# Altium PCB 400432.PcbDoc (part 2 of 7)
Units mm, origin at the board's own origin, x right, y up, seen from the top; angles counter-clockwise.
Board outline 136.53 x 63.5 mm, 4 copper layers (Top Layer, Mid-Layer 1, Mid-Layer 2, Bottom Layer), stack 1.505 mm thick; 354 components, 245 nets, 1470 pads, 1957 vias.
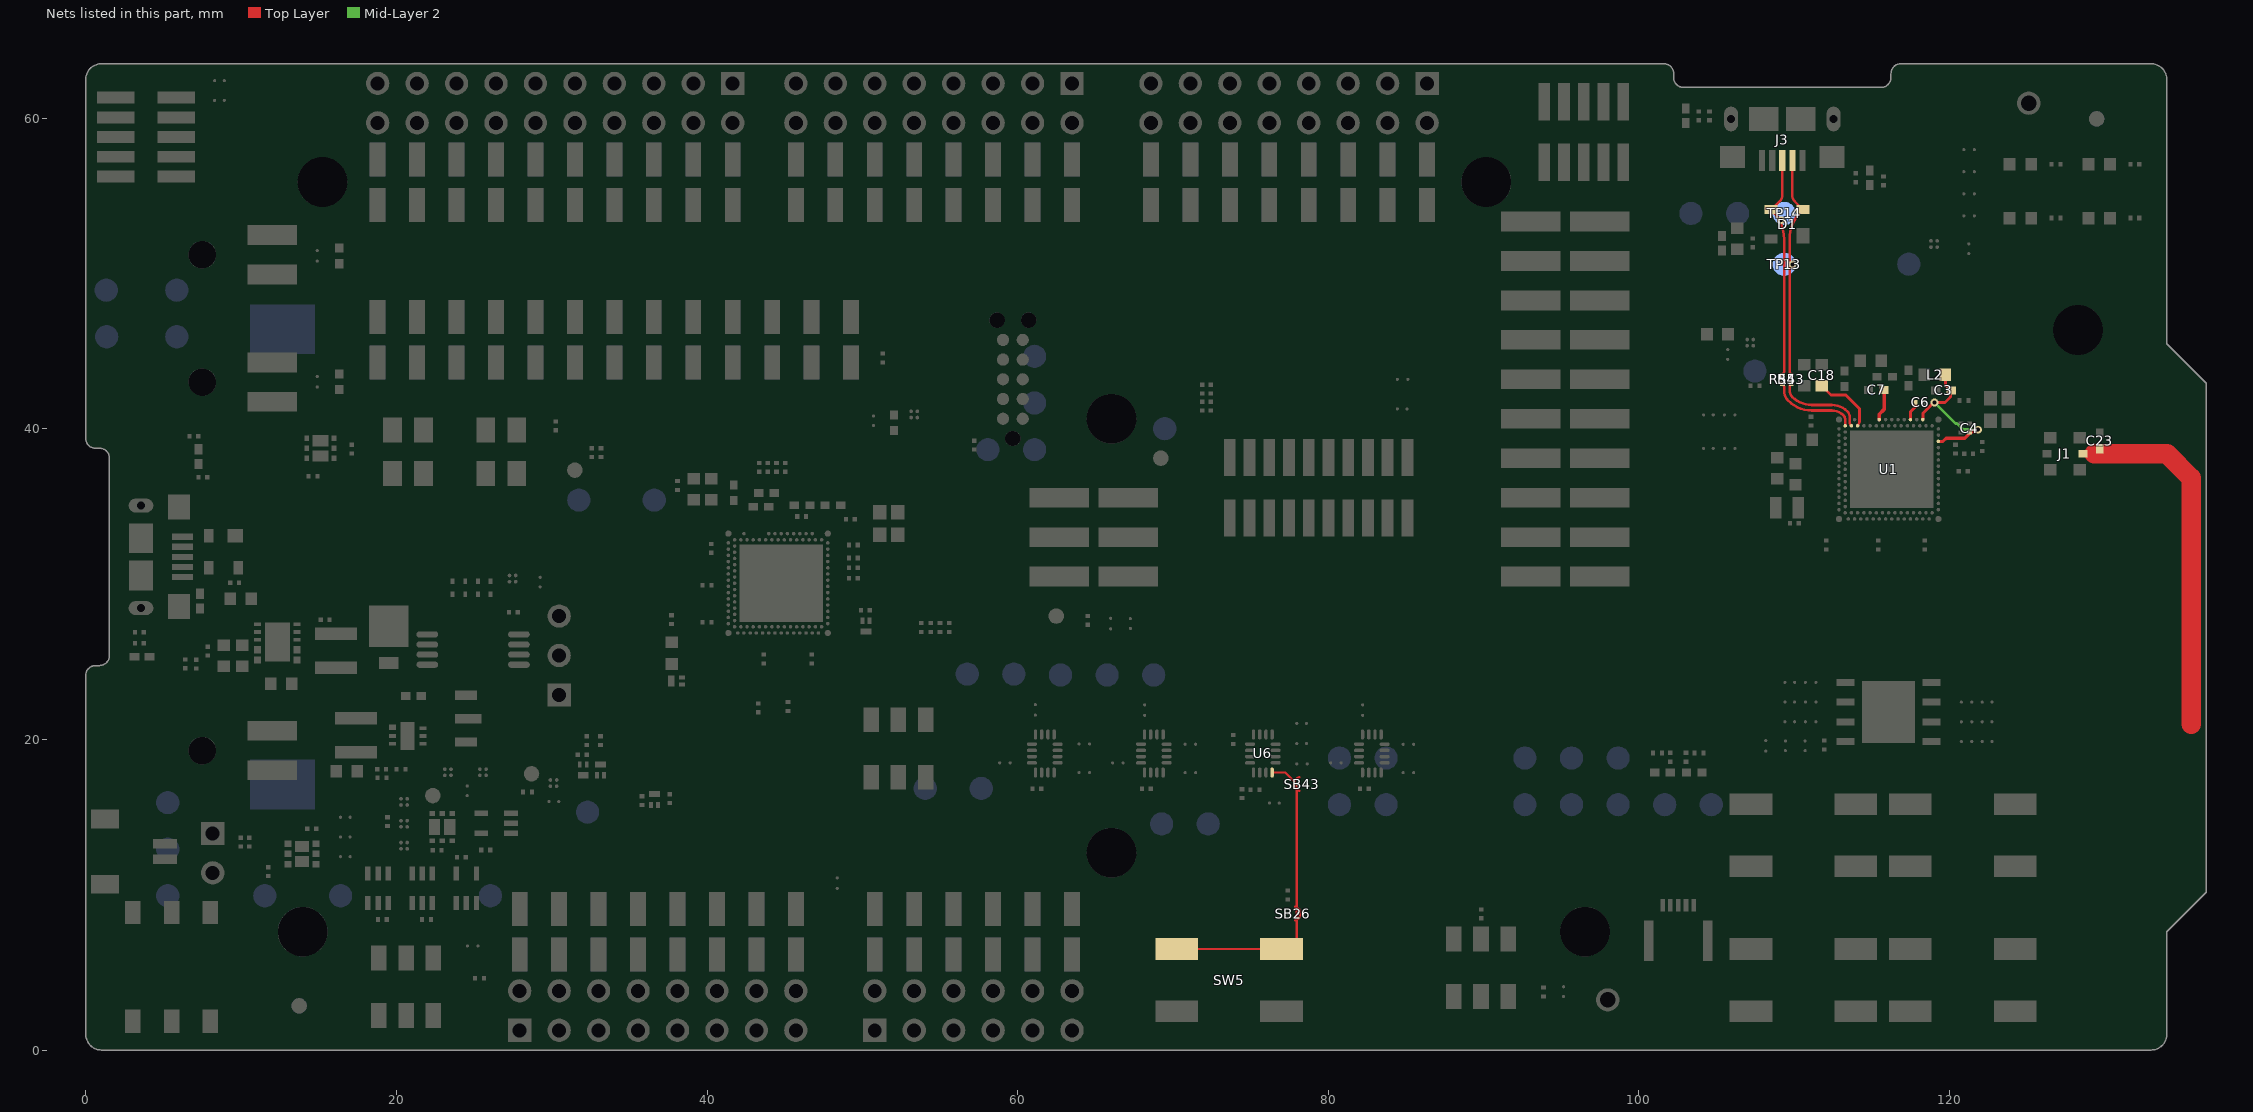
[diagram p4: the nets of this part, all layers, seen from the top]

## Footprints (in the part's own frame and the unit in brackets; to place one, negate y for a bottom-side part, rotate by r counter-clockwise, add the part's x,y. Pads: shape width x height; smd on the part's side, far side on the other; paste and mask are expansions set on the pad) (continued)
Solderbridge#4 [mm]
  round 0.2 smd paste-10: 1(-0.312,0) 2(0.312,0)
  Top Layer region: 0.077,0.432 0.152,0.505 0.271,0.467 0.335,0.424 0.409,0.351 0.462,0.292 0.521,0.193 0.549,0.099 0.544,-0.122 0.518,-0.193 0.434,-0.33 0.351,-0.411 0.259,-0.469 0.157,-0.5 0.107,-0.483 0.077,-0.43
  Top Layer region: -0.077,-0.432 -0.152,-0.505 -0.271,-0.467 -0.335,-0.424 -0.409,-0.351 -0.462,-0.292 -0.521,-0.193 -0.549,-0.099 -0.544,0.122 -0.518,0.193 -0.434,0.33 -0.351,0.411 -0.259,0.469 -0.157,0.5 -0.107,0.483 -0.077,0.43
  Top Layer lines w0.152: 0.153,0.431 cw(c0.042,0) 0.487,0 cw(c0.042,0) 0.153,-0.431 ; -0.153,0.431 ccw(c-0.042,0) -0.487,0 ccw(c-0.042,0) -0.153,-0.431
Solderbridge#5 [mm]
  round 0.2 smd paste-10: 1(-0.312,0) 2(0.312,0)
  Top Layer region: 0.077,0.432 0.152,0.505 0.271,0.467 0.335,0.424 0.409,0.351 0.462,0.292 0.521,0.193 0.549,0.099 0.544,-0.122 0.518,-0.193 0.434,-0.33 0.351,-0.411 0.259,-0.469 0.157,-0.5 0.107,-0.483 0.077,-0.43
  Top Layer region: -0.077,-0.432 -0.152,-0.505 -0.271,-0.467 -0.335,-0.424 -0.409,-0.351 -0.462,-0.292 -0.521,-0.193 -0.549,-0.099 -0.544,0.122 -0.518,0.193 -0.434,0.33 -0.351,0.411 -0.259,0.469 -0.157,0.5 -0.107,0.483 -0.077,0.43
  Top Layer lines w0.152: 0.153,-0.431 ccw(c0.042,0) 0.153,0.431 ; -0.153,-0.431 cw(c-0.042,0) -0.429,-0.22 cw(c-0.042,0) -0.479,-0.081 cw(c-0.042,0) -0.479,0.081 cw(c-0.042,0) -0.461,0.149 cw(c-0.042,0) -0.312,0.353 cw(c-0.042,0) -0.153,0.431
Solderbridge#6 [mm]
  round 0.2 smd paste-10: 1(-0.312,0) 2(0.312,0)
  Top Layer region: 0.077,0.432 0.152,0.505 0.271,0.467 0.335,0.424 0.409,0.351 0.462,0.292 0.521,0.193 0.549,0.099 0.544,-0.122 0.518,-0.193 0.434,-0.33 0.351,-0.411 0.259,-0.469 0.157,-0.5 0.107,-0.483 0.077,-0.43
  Top Layer region: -0.077,-0.432 -0.152,-0.505 -0.271,-0.467 -0.335,-0.424 -0.409,-0.351 -0.462,-0.292 -0.521,-0.193 -0.549,-0.099 -0.544,0.122 -0.518,0.193 -0.434,0.33 -0.351,0.411 -0.259,0.469 -0.157,0.5 -0.107,0.483 -0.077,0.43
  Top Layer lines w0.152: -0.153,0.431 ccw(c-0.042,0) -0.487,0 ccw(c-0.042,0) -0.312,-0.353 ccw(c-0.042,0) -0.153,-0.431 ; 0.153,0.431 cw(c0.042,0) 0.457,0.16 cw(c0.042,0) 0.487,-0.015 cw(c0.042,0) 0.486,-0.025 cw(c0.042,0) 0.457,-0.16 cw(c0.042,0) 0.407,-0.254 cw(c0.042,0) 0.33,-0.339 cw(c0.042,0) 0.153,-0.431
Solderbridge_Shorted#1 [mm]
  round 0.2 smd paste-10: 1(-0.338,0) 2(0.338,0)
  Top Layer region: -0.102,-0.432 -0.178,-0.505 -0.296,-0.467 -0.361,-0.424 -0.434,-0.351 -0.488,-0.292 -0.546,-0.193 -0.574,-0.099 -0.569,0.122 -0.544,0.193 -0.46,0.33 -0.376,0.411 -0.284,0.469 -0.183,0.5 -0.132,0.483 -0.102,0.43
  Top Layer region: 0.102,0.432 0.178,0.505 0.296,0.467 0.361,0.424 0.434,0.351 0.488,0.292 0.546,0.193 0.574,0.099 0.569,-0.122 0.544,-0.193 0.46,-0.33 0.376,-0.411 0.284,-0.469 0.183,-0.5 0.132,-0.483 0.102,-0.43
  Top Layer lines w0.152: 0.178,0.431 cw(c0.068,0) 0.178,-0.431 ; -0.178,0.431 ccw(c-0.068,0) -0.178,-0.431
  Top Layer lines w0.203: 0.338,0 -0.338,0
Solderbridge_Shorted#2 [mm]
  round 0.2 smd paste-10: 1(-0.338,0) 2(0.338,0)
  Top Layer region: 0.102,0.432 0.178,0.505 0.296,0.467 0.361,0.424 0.434,0.351 0.488,0.292 0.546,0.193 0.574,0.099 0.569,-0.122 0.544,-0.193 0.46,-0.33 0.376,-0.411 0.284,-0.469 0.183,-0.5 0.132,-0.483 0.102,-0.43
  Top Layer region: -0.102,-0.432 -0.178,-0.505 -0.296,-0.467 -0.361,-0.424 -0.434,-0.351 -0.488,-0.292 -0.546,-0.193 -0.574,-0.099 -0.569,0.122 -0.544,0.193 -0.46,0.33 -0.376,0.411 -0.284,0.469 -0.183,0.5 -0.132,0.483 -0.102,0.43
  Top Layer lines w0.152: 0.178,0.431 cw(c0.068,0) 0.512,0 cw(c0.068,0) 0.512,-0.005 cw(c0.068,0) 0.503,-0.092 cw(c0.068,0) 0.178,-0.431 ; -0.178,0.431 ccw(c-0.068,0) -0.178,-0.431
  Top Layer lines w0.203: 0.338,0 -0.338,0
Solderbridge_Shorted#3 [mm]
  round 0.2 smd paste-10: 1(-0.338,0) 2(0.338,0)
  Top Layer region: 0.102,0.432 0.178,0.505 0.296,0.467 0.361,0.424 0.434,0.351 0.488,0.292 0.546,0.193 0.574,0.099 0.569,-0.122 0.544,-0.193 0.46,-0.33 0.376,-0.411 0.284,-0.469 0.183,-0.5 0.132,-0.483 0.102,-0.43
  Top Layer region: -0.102,-0.432 -0.178,-0.505 -0.296,-0.467 -0.361,-0.424 -0.434,-0.351 -0.488,-0.292 -0.546,-0.193 -0.574,-0.099 -0.569,0.122 -0.544,0.193 -0.46,0.33 -0.376,0.411 -0.284,0.469 -0.183,0.5 -0.132,0.483 -0.102,0.43
  Top Layer lines w0.152: 0.178,0.431 cw(c0.068,0) 0.512,-0.006 cw(c0.068,0) 0.487,-0.149 cw(c0.068,0) 0.178,-0.431 ; -0.178,0.431 ccw(c-0.068,0) -0.178,-0.431
  Top Layer lines w0.203: 0.338,0 -0.338,0
Solderbridge_Shorted#4 [mm]
  round 0.2 smd paste-10: 1(-0.338,0) 2(0.338,0)
  Top Layer region: 0.102,0.432 0.178,0.505 0.296,0.467 0.361,0.424 0.434,0.351 0.488,0.292 0.546,0.193 0.574,0.099 0.569,-0.122 0.544,-0.193 0.46,-0.33 0.376,-0.411 0.284,-0.469 0.183,-0.5 0.132,-0.483 0.102,-0.43
  Top Layer region: -0.102,-0.432 -0.178,-0.505 -0.296,-0.467 -0.361,-0.424 -0.434,-0.351 -0.488,-0.292 -0.546,-0.193 -0.574,-0.099 -0.569,0.122 -0.544,0.193 -0.46,0.33 -0.376,0.411 -0.284,0.469 -0.183,0.5 -0.132,0.483 -0.102,0.43
  Top Layer lines w0.152: -0.178,-0.431 cw(c-0.068,0) -0.178,0.431 ; 0.178,-0.431 ccw(c0.068,0) 0.512,0 ccw(c0.068,0) 0.178,0.431
  Top Layer lines w0.203: -0.338,0 0.338,0
SON127P600X80_HS-9N [mm] "SON, 8-Leads, Body 5.00x6.00mm, Pitch 1.27mm, Thermal Pad 4.00x3.40mm, IPC Medium Density"
  rect 1.15x0.45 smd: 1(-2.77,1.905) 2(-2.77,0.635) 3(-2.77,-0.635) 4(-2.77,-1.905) 5(2.77,-1.905) 6(2.77,-0.635) 7(2.77,0.635) 8(2.77,1.905)
  rect 3.4x4 smd paste-1.7: 9(0,0)
  silkscreen extent -3.98,-2.6 3.1,2.67, body extent -3.05,-2.55 3.05,2.55, height 0.8
SOT65P210X100-5N [mm] "SOT23, 5-Leads, Body 2,2x2,4mm (max), Pitch 0,65mm, IPC Medium Density"
  rect 0.9x0.35 smd: 1(-0.95,0.65) 2(-0.95,0) 3(-0.95,-0.65) 4(0.95,-0.65) 5(0.95,0.65)
  silkscreen extent -1.08,-1.1 0.1,1.5, body extent -1.1,-1 1.1,1, height 0.97
SOT65P210X100-6N [mm] "SOT23, 6-Leads, Body 2,2x2,4mm (max), Pitch 0,65mm, IPC Medium Density"
  rect 0.9x0.35 smd: 1(-0.95,0.65) 2(-0.95,0) 3(-0.95,-0.65) 4(0.95,-0.65) 5(0.95,0) 6(0.95,0.65)
  silkscreen extent -1.07,-1.1 0.1,1.5, body extent -1.05,-1 1.05,1, height 0.92
SOT89-150P409X160-3N [mm] "SOT89, 3-Leads, Body 4.50x2.45mm, Pitch 1.50mm, Lead Span 4.1mm, IPC Medium Density"
  rect 1.4x0.6 smd: 1(-1.8,1.5) 3(-1.8,-1.5)
  rect 1.7x0.6 smd: 2(-1.65,0)
  Top Layer region: -1.016,-0.3 -0.635,-0.3 -0.635,0.3 -1.016,0.3
  Top Layer region: -0.8,0.3 -0.15,0.95 1.85,0.95 2.5,0.3 2.5,-0.3 1.85,-0.95 -0.15,-0.95 -0.8,-0.3
  silkscreen extent -2.05,-2.3 1.32,2.47, body extent -2.2,-2.3 1.93,2.3, height 1.6
SOT190P230X110-4L [mm] "SOT143, 4-Leads, Body 3.0x2.5mm (max), Pitch 1.90mm, IPC High Density"
  rect 0.85x1 smd: 1(-1.025,0.75)
  rect 0.85x0.6 smd: 2(-1.025,-0.95) 3(1.025,-0.95) 4(1.025,0.95)
  silkscreen extent -1.15,-1.5 0.7,1.92, body extent -1.21,-1.46 1.21,1.46, height 1
Switch-PB-6.2x6.3mm-SMD [mm] "6.2×6.5mm TACT Switch, without ground connector"
  rect 2.75x1.4 smd: 1(-3.375,2) 1(3.375,2) 2(-3.375,-2) 2(3.375,-2)
  silkscreen extent -3,-3 3,3, body extent -4,-3 4,3.3, height 3.1
Switch-Slide-J-Lead-DP3T-13x3.5mm [mm] "Slide Switch - DP3T, SMD, ON-ON-ON"
  rect 1.2x1.6 smd: 1(-4,-1.4) 2(-2,-1.4) 3(2,-1.4) 4(4,-1.4) 5(-4,1.4) 6(-2,1.4) 7(2,1.4) 8(4,1.4)
  silkscreen extent -6,-1.75 6,1.75, body extent -6,-1.8 6,1.7, height 5.5
TC2050-IDC-NLFP [mil]
  round 39 hole 39 unplated mask+3: 0(-150,0) 0(150,-40) 0(150,40)
  round 31 smd paste-196.85: 1(-100,-25) 2(-50,-25) 3(0,-25) 4(50,-25) 5(100,-25) 6(100,25) 7(50,25) 8(0,25) 9(-50,25) 10(-100,25)
  Top Layer pour cut-out: -100,25 -100,-25 100,-25 100,25
TESTPAD-TH [mm]
  round 1.5 hole 1: 1(0,0)
  silkscreen extent -1,-1 1,1
TP_SMD_Ø1.0mm [mm]
  round 1 smd paste-5: 1(0,0)
  silkscreen extent -0.7,-0.7 0.7,0.7
TP_SMD_Ø1.5mm [mm]
  round 1.5 smd paste-5: 1(0,0)
TSOP65P640X120-8N [mm] "TSOP, 8-Leads, Body 3.00x4.40mm, Pitch 0.65mm, IPC Medium Density"
  oval 1.4x0.4 smd: 1(-2.95,0.975) 2(-2.95,0.325) 3(-2.95,-0.325) 4(-2.95,-0.975) 5(2.95,-0.975) 6(2.95,-0.325) 7(2.95,0.325) 8(2.95,0.975)
  silkscreen extent -3.07,-1.55 1.85,1.87, body extent -3.2,-1.55 3.2,1.55, height 1.2
TY-NR3015 [mm] "Molded Inductor, 2-Leads, Body 3.00x3.00mm, IPC Medium Density"
  rect 0.8x2.7 smd: 1(-1.1,0) 2(1.1,0)
  silkscreen extent -2.05,-1.55 1.55,1.75, body extent -1.5,-1.5 1.5,1.5, height 1.35
USB-Micro-B-RA-SMD-PiP [mm] "Micro USB B SMT"
  rect 1.35x0.4 smd mask+0.075: 1(0,1.3) 2(0,0.65) 3(0,0) 4(0,-0.65) 5(0,-1.3)
  oval 1.6x0.9 hole 0.5 slot 1.2 at 0 deg: 6(-2.675,-3.3) 6(-2.675,3.3)
  oval 2x1.5 on Top Paste: 6(-2.675,-3.3) 6(-2.675,3.3)
  rect 1.55x1.9 smd: 6(-2.675,-1.2) 6(-2.675,1.2)
  rect 1.4x1.6 smd: 6(-0.225,-3.2) 6(-0.225,3.2)
  silkscreen extent -4.75,-3.75 0.25,3.75, body extent -5.28,-4.1 0.15,4.1, height 2.72
USP-6C [mm] "DFN, 6-Leads, Body 2.00x1.80mm, Pitch 0.50mm, Thermal Pad 1.00x1.40mm, IPC Medium Density"
  rect 0.45x0.35 smd paste-0.05 mask+0.075: 1(-0.975,0.55)
  rect 0.45x0.25 smd paste-0.05 mask+0.075: 2(-0.975,0) 3(-0.975,-0.5) 4(0.975,-0.5) 5(0.975,0) 6(0.975,0.5)
  rect 0.9x1.8 smd paste-2: 7(0,0)
  Top Layer region: -0.5,-0.8 0.5,-0.8 0.5,0.8 -0.5,0.8
  silkscreen extent -1.42,-1.07 0.97,1.12, body extent -0.93,-1.02 0.93,1.02, height 0.6
XQFN40P180X260X50-16N [mm] "QFN, 16-Leads, Body 1.80x2.60mm, Pitch 0.40mm, IPC Medium Density"
  oval 0.65x0.22 smd paste-0.02 mask+0.04: 1(-0.825,0.6) 2(-0.825,0.2) 3(-0.825,-0.2) 4(-0.825,-0.6) 9(0.825,-0.6) 10(0.825,-0.2) 11(0.825,0.2) 12(0.825,0.6)
  oval 0.22x0.65 smd paste-0.02 mask+0.04: 5(-0.6,-1.225) 6(-0.2,-1.225) 7(0.2,-1.225) 8(0.6,-1.225) 13(0.6,1.225) 14(0.2,1.225) 15(-0.2,1.225) 16(-0.6,1.225)
  silkscreen extent -1.45,-1.4 1,1.4, body extent -0.91,-1.31 0.91,1.31, height 0.55
XTAL_2012 [mm] "XTAL SMD 2.0 x 1.2 mm"
  rect 0.75x1.4 smd: 1(-0.725,0) 2(0.725,0)
  silkscreen extent -0.24,-0.6 0.24,0.6, body extent -1,-0.61 1,0.61, height 0.6

## Part data
Bat1: library part "Bat Holder L-KLS5-CR2032-23-B1", "Bat Holder CR2032 SMD", Manufacturer="KLS Electronic", Manufacturer Part Number=L-KLS5-CR2032-23-B1, Part number IPS=N.A., Artikkelnr Noca=N.A., Author=rsk, Component Class=Connectors, ComponentLink1Description=Datasheet, ComponentLink1URL=http://www.klsele.com/admin/product_upload/20151124103736KLS5-CR2032-23-B.pdf, ComponentLink2Description="Supplier link", ComponentLink2URL=N.A., Footprint Doc=CR2032_HOLDER, HelpURL=http://www.klsele.com/products/connectors/Coin-Cell-Holders-Series/4685.html, LatestRevisionDate=2019-08-29, Note="Bat Holder CR2032", Pad Count=2, Part Number="Bat Holder L-KLS5-CR2032-23-B1", Part number Norautron=N.A., PartId=100500651, Published=2019-08-28, Supplier 1=Cabcon, Supplier 2=Mouser, Supplier Part Number 1=L-KLS5-CR2032-23-B1, Supplier Part Number 2=614-SMTU2032-LF
C1: library part C0201-0.7p-HQ-Murata, "Ceramic Capacitor C0G, NP0 0201, ±0.1pF 25V", Manufacturer=Murata, Manufacturer Part Number=GJM0335C1ER70BB01D, Part number IPS=N.A., Supplier Part Number 1=490-8076-1-ND, Artikkelnr Noca=N.A., Component Class=Capacitors, ComponentLink1Description=Datasheet, ComponentLink1URL=https://search.murata.co.jp/Ceramy/image/img/A01X/G101/ENG/GJM0335C1ER70BB01-01.pdf, ComponentLink2Description="Supplier link", ComponentLink2URL=https://www.murata.com/en-eu/products/productdetail?partno=GJM0335C1ER70BB01%23, Footprint Doc=0201, HelpURL=https://www.digikey.no/product-detail/en/murata-electronics/GJM0335C1ER70BB01D/490-8076-1-ND/4380362, LatestRevisionDate=2020-10-13, Note=25V, Pad Count=2, Part Number=C0201-0.7p-HQ-Murata, PartId=100200441, Pin Count=2, Published=2020-03-05, Publisher="Nordic Semiconductor", Supplier 1=Digi-Key, Supplier 2=N.A., Supplier Part Number 2=N.A.
C2 C3 C5 C7 C16 C25 C26 C38 C39 C66 C74: library part C0402-1µ0, "Capacitor, X5R, ±5%, 6.3V", Manufacturer=N.A., Part number IPS="00000007786, 00000003457", Supplier Part Number 1=1276-1444-1-ND, Artikkelnr Noca=20039235, Component Class=Capacitors, ComponentLink1Description=Datasheet, ComponentLink1URL=N.A., ComponentLink2Description="Supplier link", ComponentLink2URL=N.A., Footprint Doc=0402, HelpURL=N.A., LatestRevisionDate=2016-08-22, Manufacturer Part Number=N.A., Note=6.3V, Pad Count=2, Part Number=C0402-1µ0, PartId=100200190, Published=2009-05-08, Supplier 1=Digi-Key, Supplier 2=N.A., Supplier Part Number 2=N.A.
  C2 C3 C5 C7 C16 C66: Pin Count=2, Publisher="Nordic Semiconductor"
  C25 C26 C38 C39 C74: Author=rsk, Part number Norautron=N.A.
C4 C27: library part C0201-2n2, "Capacitor, X7R, ±10%, 10V", Manufacturer=N.A., Part number IPS=00000001778, Artikkelnr Noca=N.A., Component Class=Capacitors, ComponentLink1Description=Datasheet, ComponentLink1URL=N.A., ComponentLink2Description="Supplier link", ComponentLink2URL=N.A., Footprint Doc=0201, HelpURL=N.A., LatestRevisionDate=2014-11-13, Manufacturer Part Number=N.A., Note=10V, Pad Count=2, Part Number=C0201-2n2, PartId=100200060, Published=2014-11-13, Supplier 1=N.A., Supplier 2=N.A., Supplier Part Number 1=N.A., Supplier Part Number 2=N.A.
  C4: Pin Count=2, Publisher="Nordic Semiconductor"
  C27: Author=rsk, Part number Norautron=N.A.
C6 C8 C9 C10 C11 C12 C13 C14 C15 C24 C30 C31 C32 C33 C34 C35 C36 C37 C41 C42 C45 C46 C48 C50 C52 C54 C55 C56 C65 C68 C69 C70 C71 C73: library part C0201-100n, "Capacitor, X5R, ±10%", Manufacturer=N.A., Part number IPS="00000001248, 00000002505", Artikkelnr Noca=N.A., Component Class=Capacitors, ComponentLink1Description=Datasheet, ComponentLink1URL=N.A., ComponentLink2Description="Supplier link", ComponentLink2URL=N.A., Footprint Doc=0201, HelpURL=N.A., LatestRevisionDate=2017-11-09, Manufacturer Part Number=N.A., Note=16V, Pad Count=2, Part Number=C0201-100n, PartId=100200078, Published=2014-11-13, Supplier 1=N.A., Supplier 2=N.A., Supplier Part Number 1=N.A., Supplier Part Number 2=N.A.
  C6 C8 C9 C10 C11 C12 C13 C14 C15 C24 C41 C42 C45 C46 C48 C50 C52 C54 C55 C56 C65 C68 C69 C70 C71: Pin Count=2, Publisher="Nordic Semiconductor"
  C30 C31 C32 C33 C34 C35 C36 C37 C73: Author=rsk, Part number Norautron=N.A.
C17 C18 C20 C40: library part C0603-4µ7-10V-X7S, "Capacitor, X7S, ±10%, 10V", Manufacturer=N.A., Part number IPS=00000001779, Supplier Part Number 1=445-14258-1-ND, Artikkelnr Noca=20030013, Component Class=Capacitors, ComponentLink1Description=Datasheet, ComponentLink1URL=N.A., ComponentLink2Description="Supplier link", ComponentLink2URL=N.A., Footprint Doc=0603, HelpURL=N.A., LatestRevisionDate=2016-08-15, Manufacturer Part Number=N.A., Note=10V, Pad Count=2, Part Number=C0603-4µ7-10V-X7S, PartId=100200351, Published=2016-08-15, Supplier 1=Digi-Key, Supplier 2=N.A., Supplier Part Number 2=N.A.
  C17 C18 C20: Pin Count=2, Publisher="Nordic Semiconductor"
  C40: Author=rsk, Part number Norautron=N.A.
C19: library part C0603-2µ2, "Capacitor, X7R, ±10%", Manufacturer=N.A., Artikkelnr Noca=20039322, Component Class=Capacitors, ComponentLink1Description=Datasheet, ComponentLink1URL=N.A., ComponentLink2Description="Supplier link", ComponentLink2URL=N.A., Footprint Doc=0603, HelpURL=N.A., LatestRevisionDate=2016-10-10, Manufacturer Part Number=N.A., Note=6.3V, Pad Count=2, Part Number=C0603-2µ2, Part number IPS=N.A., PartId=100200272, Pin Count=2, Published=2009-05-08, Publisher="Nordic Semiconductor", Supplier 1=N.A., Supplier 2=N.A., Supplier Part Number 1=N.A., Supplier Part Number 2=N.A.
C21 C28 C29: library part C0201-N.C., "Not mounted", Manufacturer=N.A., Artikkelnr Noca=N.A., Assembly="Not mounted", Component Class=Capacitors, ComponentLink1Description=Datasheet, ComponentLink1URL=N.A., ComponentLink2Description="Supplier link", ComponentLink2URL=N.A., Footprint Doc=0201, HelpURL=N.A., LatestRevisionDate=2014-11-13, Manufacturer Part Number=N.A., Note="Chip Cap", Pad Count=2, Part Number=C0201-N.C., Part number IPS=N.A., PartId=100200001, Pin Count=2, Published=2014-11-13, Publisher="Nordic Semiconductor", Supplier 1=N.A., Supplier 2=N.A., Supplier Part Number 1=N.A., Supplier Part Number 2=N.A.
C22 C47 C49: library part C0201-10n, "Capacitor, X7R, ±10%", Manufacturer=N.A., Part number IPS=00000003480, Artikkelnr Noca=N.A., Component Class=Capacitors, ComponentLink1Description=Datasheet, ComponentLink1URL=N.A., ComponentLink2Description="Supplier link", ComponentLink2URL=N.A., Footprint Doc=0201, HelpURL=N.A., LatestRevisionDate=2017-11-09, Manufacturer Part Number=N.A., Note=10V, Pad Count=2, Part Number=C0201-10n, PartId=100200067, Published=2014-11-13, Supplier 1=N.A., Supplier 2=N.A., Supplier Part Number 1=N.A., Supplier Part Number 2=N.A.
  C47 C49: Pin Count=2, Publisher="Nordic Semiconductor"
C23: library part C0402-1.2p, "Capacitor, NP0, ±0.1pF", Manufacturer=N.A., Part number IPS=00000005410, Artikkelnr Noca=20029157, Component Class=Capacitors, ComponentLink1Description=Datasheet, ComponentLink1URL=N.A., ComponentLink2Description="Supplier link", ComponentLink2URL=N.A., Footprint Doc=0402, HelpURL=N.A., LatestRevisionDate=2011-05-11, Manufacturer Part Number=N.A., Note=50V, Pad Count=2, Part Number=C0402-1.2p, PartId=100200119, Pin Count=2, Published=2009-05-08, Publisher="Nordic Semiconductor", Supplier 1=N.A., Supplier 2=N.A., Supplier Part Number 1=N.A., Supplier Part Number 2=N.A.
C43 C44: library part C0402-300p, "Capacitor, NP0, ±5%", Manufacturer=N.A., Part number IPS=00000007788, Supplier Part Number 1=490-3234-1-ND, Artikkelnr Noca=20020004, Component Class=Capacitors, ComponentLink1Description=Datasheet, ComponentLink1URL=N.A., ComponentLink2Description="Supplier link", ComponentLink2URL=N.A., Footprint Doc=0402, HelpURL=N.A., LatestRevisionDate=2020-10-13, Manufacturer Part Number=N.A., Note=50V, Pad Count=2, Part Number=C0402-300p, PartId=100200155, Pin Count=2, Published=2015-05-29, Publisher="Nordic Semiconductor", Supplier 1=Digi-Key, Supplier 2=N.A., Supplier Part Number 2=N.A.
C51 C53 C67: library part C0603-1µ0, "Capacitor, X7R, ±10%", Manufacturer=N.A., Part number IPS=00000000616, Artikkelnr Noca=20039282, Component Class=Capacitors, ComponentLink1Description=Datasheet, ComponentLink1URL=N.A., ComponentLink2Description="Supplier link", ComponentLink2URL=N.A., Footprint Doc=0603, HelpURL=N.A., LatestRevisionDate=2013-06-05, Manufacturer Part Number=N.A., Note=16V, Pad Count=2, Part Number=C0603-1µ0, PartId=100200271, Pin Count=2, Published=2009-05-08, Publisher="Nordic Semiconductor", Supplier 1=N.A., Supplier 2=N.A., Supplier Part Number 1=N.A., Supplier Part Number 2=N.A.
C57 C59 C60 C63: library part C0603-10µ-25V, "Capacitor, X5R, ±20%, 25V", Manufacturer="Samsung Electro-Mechanics America", Manufacturer Part Number=CL10A106MA8NRNC, Part number IPS=00000009948, Part number Norautron=N.A., Supplier Part Number 1=1276-1869-1-ND, Artikkelnr Noca=20039436, Author=rsk, Component Class=Capacitors, ComponentLink1Description=Datasheet, ComponentLink1URL=N.A., ComponentLink2Description="Supplier link", ComponentLink2URL=N.A., Footprint Doc=0603, HelpURL=http://www.samsungsem.com/kr/front/downloadcms.do?path=/kr/support/product-search/mlcc/__icsFiles/afieldfile/2014/11/05&fileName=S_CL10A106MA8NRNC.pdf, LatestRevisionDate=2015-04-10, Note=25V, Pad Count=2, Part Number=C0603-10µ-25V, PartId=100200354, Published=2015-04-10, Supplier 1=Digi-Key, Supplier 2=N.A., Supplier Part Number 2=N.A.
C58: library part C0201-15p-25V-COG, "Ceramic Capacitor C0G, NP0 0201, ±5% 25V", Manufacturer="Walsin Technology Corporation", Manufacturer Part Number=0201N150J250CT, Part number IPS=N.A., Supplier Part Number 1=1292-1138-1-ND, Artikkelnr Noca=N.A., Component Class=Capacitors, ComponentLink1Description=Datasheet, ComponentLink1URL=http://www.passivecomponent.com/wp-content/uploads/ecd/0201N150J250CT-IL.pdf, ComponentLink2Description="Supplier link", ComponentLink2URL=https://www.digikey.no/product-detail/en/walsin-technology-corporation/0201N150J250CT/1292-1138-1-ND/9355142, Footprint Doc=0201, HelpURL=N.A., LatestRevisionDate=2020-10-13, Note="Chip Cap 5%", Pad Count=2, Part Number=C0201-15p-25V-COG, PartId=100200443, Pin Count=2, Published=2020-03-17, Publisher="Nordic Semiconductor", Supplier 1=Digi-Key, Supplier 2=N.A., Supplier Part Number 2=N.A.
C61: library part C0402-4µ7-10V-X5R, "CAP CER 4.7UF 10V X5R 0402", Manufacturer=Murata, Manufacturer Part Number=GRM155R61A475MEAAD, Part number IPS=N.A., Supplier Part Number 1=490-14306-1-ND, Artikkelnr Noca=N.A., Component Class=Capacitors, ComponentLink1Description=Datasheet, ComponentLink1URL=http://search.murata.co.jp/Ceramy/image/img/A01X/G101/ENG/GRM155R61A475MEAA-01.pdf, ComponentLink2Description="Supplier link", ComponentLink2URL=https://www.digikey.com/product-detail/en/murata-electronics-north-america/GRM155R61A475MEAAD/490-14306-1-ND/6234742, Footprint Doc=0402, HelpURL=https://psearch.en.murata.com/capacitor/product/GRM155R61A475MEAA%23.html, LatestRevisionDate=2020-10-13, Note=10V, Pad Count=2, Part Number=C0402-4µ7-10V-X5R, PartId=100200415, Pin Count=2, Published=2018-10-04, Publisher="Nordic Semiconductor", Supplier 1=Digi-Key, Supplier 2=N.A., Supplier Part Number 2=N.A.
C62: library part C0201-150p-25V-COG, "Ceramic Capacitor C0G, NP0 0201, ±5% 25V", Manufacturer=Murata, Manufacturer Part Number=GRM0335C1E151JA01D, Part number IPS=N.A., Supplier Part Number 1=1292-1138-1-ND, Artikkelnr Noca=N.A., Component Class=Capacitors, ComponentLink1Description=Datasheet, ComponentLink1URL=https://www.mouser.com/datasheet/2/281/murata_03052018_GRM_Series_1-1310166.pdf, ComponentLink2Description="Supplier link", ComponentLink2URL=https://www.mouser.com/ProductDetail/Murata-Electronics/GRM0335C1E151JA01D?qs=%2Fha2pyFaduiNjPL6xbzKSo%252BchgTMqklsGrBRdYVX326W%252BRpjq1WqAQZ5mC%252Bu6szW, Footprint Doc=0201, HelpURL=N.A., LatestRevisionDate=2020-10-13, Note="Chip Cap 5%", Pad Count=2, Part Number=C0201-150p-25V-COG, PartId=100200444, Pin Count=2, Published=2020-03-17, Publisher="Nordic Semiconductor", Supplier 1=Digi-Key, Supplier 2=N.A., Supplier Part Number 2=N.A.
C64: library part C0201-470n-16V-X5R, "Ceramic Capacitor X5R 0201, ±10% 16V", Manufacturer="Taiyo Yuden", Manufacturer Part Number=EMK063BBJ474KPLF, Part number IPS=N.A., Supplier Part Number 1=587-6264-1-ND, Artikkelnr Noca=N.A., Component Class=Capacitors, ComponentLink1Description=Datasheet, ComponentLink1URL=https://ds.yuden.co.jp/TYCOMPAS/ut/specSheet?pn=EMK063BBJ474KPLF, ComponentLink2Description="Supplier link", ComponentLink2URL=https://ds.yuden.co.jp/TYCOMPAS/ut/sm/detail?pn=EMK063BBJ474KPLF&u=M, Footprint Doc=0201, HelpURL=https://www.digikey.no/products/en?keywords=587-6264-1-ND, LatestRevisionDate=2020-10-13, Note=16V, Pad Count=2, Part Number=C0201-470n-16V-X5R, PartId=100200442, Pin Count=2, Published=2020-03-05, Publisher="Nordic Semiconductor", Supplier 1=Digi-Key, Supplier 2=N.A., Supplier Part Number 2=N.A.
C72: library part C0603-4µ7-6.3V-X7R, "Capacitor, X7R, ±10%, 6.3V", Manufacturer="Samsung Electro-Mechanics America", Manufacturer Part Number=CL10B475KQ8NQNC, Part number IPS=00000002541, Part number Norautron=N.A., Supplier Part Number 1=1276-2087-1-ND, Artikkelnr Noca=20039473, Author=rsk, Component Class=Capacitors, ComponentLink1Description=Datasheet, ComponentLink1URL=N.A., ComponentLink2Description="Supplier link", ComponentLink2URL=N.A., Footprint Doc=0603, HelpURL=http://media.digikey.com/pdf/Data%20Sheets/Samsung%20PDFs/CL10B475KQ8NQNC_Spec.pdf, LatestRevisionDate=2015-06-10, Note=6.3V, Pad Count=2, Part Number=C0603-4µ7-6.3V-X7R, PartId=100200350, Published=2015-06-10, Supplier 1=Digi-Key, Supplier 2=N.A., Supplier Part Number 2=N.A.
D1 D2: "Ultra low capacitance double rail-to-rail ESD protection diode", Manufacturer="NXP Semiconductors", Part number IPS=00000009951, Supplier Part Number 1=568-4140-1-ND, Artikkelnr Noca=10069015, Component Class=Semiconductors, ComponentLink1Description=Datasheet, ComponentLink1URL=N.A., ComponentLink2Description="Supplier link", ComponentLink2URL=N.A., Footprint Doc=SOT-143B, HelpURL=http://www.farnell.com/datasheets/109718.pdf, LatestRevisionDate=2017-11-09, Manufacturer Part Number=PRTR5V0U2X, Note=N.A., Pad Count=4, Part Number=PRTR5V0U2X, PartId=101300082, Pin Count=4, Published=2012-06-11, Publisher="Nordic Semiconductor", Supplier 1=Digi-Key, Supplier 2=Farnell, Supplier Part Number 2=152-4157
D3 D5 D6 D7: "20V schottky barrier diode, Vf 350 mV @ 100 mA, Ir 2.0 µA @ 10 V, If 500 mA", Manufacturer="ON Semiconductor", Part number IPS=00000009952, Supplier Part Number 1=NSR0620P2T5GOSCT-ND, Artikkelnr Noca=10029169, Component Class=Semiconductors, ComponentLink1Description=Datasheet, ComponentLink1URL=N.A., ComponentLink2Description="Supplier link", ComponentLink2URL=N.A., Footprint Doc=SOD-923, HelpURL=http://www.onsemi.com/pub_link/Collateral/NSR0620P2-D.PDF, LatestRevisionDate=2016-07-07, Manufacturer Part Number=NSR0620P2T5G, Note=N.A., Pad Count=2, Part Number=NSR0620P2T5G, PartId=101300131, Pin Count=2, Published=2016-07-07, Publisher="Nordic Semiconductor", Supplier 1=Digi-Key, Supplier 2=N.A., Supplier Part Number 2=N.A.
D4: "Diode Schottky Vf=0.455V @ 100mA, Vr=10V, If=1000mA, Ir=1µA @ 10V", Manufacturer="ON Semiconductor", Manufacturer Part Number=MBRM110ET1G, Part number IPS=00000009953, Supplier Part Number 1=MBRM110ET1GOSTR-ND, Artikkelnr Noca=10029172, Component Class=Semiconductors, ComponentLink1Description=Datasheet, ComponentLink1URL=N.A., ComponentLink2Description="Supplier link", ComponentLink2URL=N.A., Footprint Doc=DO-216AA, HelpURL=http://media.digikey.com/pdf/Data%20Sheets/ON%20Semiconductor%20PDFs/MBRM110E-D.pdf, LatestRevisionDate=2016-10-24, Note=N.A., Pad Count=2, Part Number=MBRM110E, PartId=101300099, Pin Count=2, Published=2016-10-24, Publisher="Nordic Semiconductor", Supplier 1=Digi-Key, Supplier 2=Farnell, Supplier Part Number 2=236-9429
FB1 FB2 FB3 FB4 FB5 FB6: library part FB0402-120R@100M-500mA, "Ferrite Bead, 120 Ohm @ 100MHz, 500mA, 250 mOhm Max", Manufacturer=Murata, Manufacturer Part Number=BLM15AG121SN1D, Part number IPS=00000009954, Supplier Part Number 1=490-1005-1-ND, Artikkelnr Noca=33029317, Component Class=Inductors, ComponentLink1Description=Datasheet, ComponentLink1URL=N.A., ComponentLink2Description="Supplier link", ComponentLink2URL=N.A., Footprint Doc=0402, HelpURL=http://search.murata.co.jp/Ceramy/image/img/PDF/ENG/L0110S0100BLM15A_SN.pdf, LatestRevisionDate=2014-01-10, Note="Chip EMIFIL Inductor Type Chip Ferrite Bead", Pad Count=2, Part Number=FB0402-120R@100M-500mA, PartId=100300099, Pin Count=2, Published=2011-11-14, Publisher="Nordic Semiconductor", Supplier 1=Digi-Key, Supplier 2=Farnell, Supplier Part Number 2=151-5760
Fid1 Fid2: library part Fid-Mark, "Fiducial Mark", Part number IPS=N.A., Artikkelnr Noca=N.A., ComponentLink1Description=Datasheet, ComponentLink2Description="Supplier link", Footprint Doc=Fiducial, LatestRevisionDate=2009-12-12, Part Number=Fid-Mark, Pin Count=1, Published=2009-12-12, Publisher="Nordic Semiconductor"
J1: "Coaxial Connector with Switch", Manufacturer=Murata, Part number IPS=00000009955, Supplier Part Number 1=490-4981-1-ND, Artikkelnr Noca=55029011, Component Class=Connectors, ComponentLink1Description=Datasheet, ComponentLink1URL=N.A., ComponentLink2Description="Supplier link", ComponentLink2URL=N.A., Footprint Doc=COAXIAL-SWF, HelpURL=http://www.murata.com/products/catalog/pdf/o33e.pdf, LatestRevisionDate=2014-04-24, Manufacturer Part Number=MM8130-2600, Note=N.A., Pad Count=3, Part Number=MM8130-2600, PartId=100500400, Pin Count=3, Published=2014-04-24, Publisher="Nordic Semiconductor", Supplier 1=Digi-Key, Supplier 2=Mouser, Supplier Part Number 2=81-MM8130-2600RA2
J2 J3: library part USB-Micro-B-RA-SMD-PiP, "MicroUSB-B-SMT", Manufacturer="Allen Creations Corp.", Manufacturer Part Number=AJU55-BS2111-L, Part number IPS=00000007790, Artikkelnr Noca=55029020, Component Class=Connectors, ComponentLink1Description=Datasheet, ComponentLink1URL=N.A., ComponentLink2Description="Supplier link", ComponentLink2URL=N.A., Footprint Doc=USB-Micro-B-RA-SMD-PiP, HelpURL="\\hizz\pro\app9717\Datasheet\connectors\Allen Creations Corp\AJU-211.pdf", LatestRevisionDate=2016-04-21, Note=N.A., Pad Count=5, Part Number=USB-Micro-B-RA-SMD-PiP, PartId=100500490, Pin Count=5, Published=2014-10-07, Publisher="Nordic Semiconductor", Supplier 1=Cabcon, Supplier 2=Digi-Key, Supplier Part Number 1=AJU55-BS2111-L, Supplier Part Number 2=609-4616-1-ND
J4: library part TC2050-IDC-NLFP, "CBL PLUG-OF-NAILS 10-PIN", Manufacturer="Tag-Connect LLC", Part number IPS=N.A., Supplier Part Number 1=TC2050-IDC-NL-ND, Artikkelnr Noca=N.A., Component Class=Connectors, ComponentLink1Description=Datasheet, ComponentLink1URL=N.A., ComponentLink2Description="Supplier link", ComponentLink2URL=N.A., Footprint Doc=TC2050-IDC-NLFP, HelpURL=http://www.tag-connect.com/Materials/TC2050-IDC%20Datasheet.pdf, LatestRevisionDate=2012-11-21, Manufacturer Part Number=TC2050-IDC-NLFP, Note=N.A., Pad Count=10, Part Number=TC2050-IDC-NLFP, PartId=100500463, Pin Count=10, Published=2012-11-21, Publisher="Nordic Semiconductor", Supplier 1=Digi-Key, Supplier 2=N.A., Supplier Part Number 2=N.A.
J5: library part FPC_05P-0.5mm-RA-SMD, "0.5mm FPC, 5P,Right Angle SMT,Double Contact,H=1.2mm,White, Tin plated", Manufacturer=W-CON, Manufacturer Part Number=5141-05RZDNWR01, Part number IPS=00000007792, Artikkelnr Noca=55010020, Component Class=Connectors, ComponentLink1Description=Datasheet, ComponentLink1URL=N.A., ComponentLink2Description="Supplier link", ComponentLink2URL=N.A., Footprint Doc=FPC_05P-0.5mm-RA-SMD, HelpURL=\\hizz\pro\app9717\Datasheet\connectors\W-CON\5141-XXRZDNXX0X.pdf, LatestRevisionDate=2016-04-21, Note=N.A., Pad Count=7, Part Number=FPC_05P-0.5mm-RA-SMD, PartId=100500528, Pin Count=7, Published=2015-06-22, Publisher="Nordic Semiconductor", Supplier 1=Cabcon, Supplier 2=Digi-Key, Supplier Part Number 1=5141-05RZDNWR01, Supplier Part Number 2=WM9836CT-ND
J6: library part SM02B-SRSS-TB, "1.0mm pitch connector side entry SMD", Manufacturer="JST Sales America Inc.", Manufacturer Part Number=SM02B-SRSS-TB(LF)(SN), Part number IPS=00000007791, Artikkelnr Noca=55010030, Component Class=Connectors, ComponentLink1Description=Datasheet, ComponentLink1URL=N.A., ComponentLink2Description="Supplier link", ComponentLink2URL=N.A., Footprint Doc=SM02B-SRSS-TB, HelpURL=http://www.jst-mfg.com/product/pdf/eng/eSH.pdf, LatestRevisionDate=2016-06-20, Note="JST, Header", Pad Count=2, Part Number=SM02B-SRSS-TB, PartId=100500383, Pin Count=2, Published=2016-06-20, Publisher="Nordic Semiconductor", Supplier 1=Cabcon, Supplier 2=Digi-Key, Supplier Part Number 1=SM02B-SRSS-TB(LF)(SN), Supplier Part Number 2=455-1802-1-ND
L1: library part L0201-2n2-0.1nH, "FIXED IND 2.2NH 600MA 120 MOHM", Manufacturer=Murata, Manufacturer Part Number=LQP03HQ2N2B02D, Part number IPS=N.A., Supplier Part Number 1=490-13899-1-ND, Artikkelnr Noca=N.A., Component Class=Inductors, ComponentLink1Description=Datasheet, ComponentLink1URL=https://search.murata.co.jp/Ceramy/image/img/P02/JELF243C-0021.pdf, ComponentLink2Description="Supplier link", ComponentLink2URL=https://www.murata.com/en-eu/products/productdetail?partno=LQP03HQ2N2B02%23, Footprint Doc=0201, HelpURL=https://www.digikey.no/product-detail/en/murata-electronics/LQP03HQ2N2B02D/490-13899-1-ND/6098849, LatestRevisionDate=2020-03-05, Note="High frequency chip inductor ±5%", Pad Count=2, Part Number=L0201-2n2-0.1nH, PartId=100300398, Pin Count=2, Published=2020-03-05, Publisher="Nordic Semiconductor", Supplier 1=Digi-Key, Supplier 2=N.A., Supplier Part Number 2=N.A.
L2 L3 L4: library part L0603-10µ-TDK, "Inductor, 250mA, ±20%, 1.05ohm. -55°C ~ 125°C", Manufacturer="TDK Corporation", Manufacturer Part Number=MLZ1608M100WTD25, Part number IPS=N.A., Supplier Part Number 1=445-175588-1-ND, Artikkelnr Noca=N.A., Component Class=Inductors, ComponentLink1Description=Datasheet, ComponentLink1URL=N.A., ComponentLink2Description="Supplier link", ComponentLink2URL=N.A., Footprint Doc=0603, HelpURL=https://product.tdk.com/info/en/catalog/datasheets/inductor_automotive_decoupling_mlz1608_en.pdf, LatestRevisionDate=2012-09-19, Note=N.A., Pad Count=2, Part Number=L0603-10µ-TDK, PartId=100300079, Pin Count=2, Published=2019-05-06, Publisher="Nordic Semiconductor", Supplier 1=Digi-Key, Supplier 2=Mouser, Supplier Part Number 2=810-MLZ1608M100WTD25
L6: library part NR3015-4µ7-1.04A-144mOhm, "Ferrite Inductor, Shielded, 1,04A, 144mOhm", Manufacturer="Taiyo Yuden", Manufacturer Part Number=NR3015T4R7M, Part number IPS=00000009960, Supplier Part Number 1=587-1649-1-ND, Artikkelnr Noca=33029551, Component Class=Inductors, ComponentLink1Description=Datasheet, ComponentLink1URL=N.A., ComponentLink2Description="Supplier link", ComponentLink2URL=N.A., Footprint Doc=1212, HelpURL=http://www.yuden.co.jp/ut/product/category/inductor/NR3015T4R7M.pdf, LatestRevisionDate=2014-01-22, Note=N.A., Pad Count=2, Part Number=NR3015-4µ7-1.04A-144mOhm, PartId=100300145, Pin Count=2, Published=2014-01-22, Publisher="Nordic Semiconductor", Supplier 1=Digi-Key, Supplier 2=Mouser, Supplier Part Number 2=963-NR3015T4R7M
L7: library part NR3015-2µ2-1.5A-72mOhm, "Ferrite Inductor, Shielded, 1,5A, 72mOhm", Manufacturer="Taiyo Yuden", Manufacturer Part Number=NR3015T2R2M, Part number IPS=00000009959, Supplier Part Number 1=587-1648-1-ND, Artikkelnr Noca=33029487, Component Class=Inductors, ComponentLink1Description=Datasheet, ComponentLink1URL=N.A., ComponentLink2Description="Supplier link", ComponentLink2URL=N.A., Footprint Doc=1212, HelpURL=http://www.yuden.co.jp/ut/product/category/inductor/NR3015T2R2M.pdf, LatestRevisionDate=2014-01-22, Note=N.A., Pad Count=2, Part Number=NR3015-2µ2-1.5A-72mOhm, PartId=100300143, Pin Count=2, Published=2014-01-22, Publisher="Nordic Semiconductor", Supplier 1=Digi-Key, Supplier 2=Farnell, Supplier Part Number 2=188-5853
LED1 LED2 LED3 LED4: library part "VS 25C7M5", "LED, Green, 0603, 573nm, Vf=2.0V, 24mcd, - 40 to +85°C", Manufacturer="Victory Electronics", Part number IPS="00000001274, 00000009961", Supplier Part Number 1=N.A., Artikkelnr Noca=13019193, Component Class=Optoelectronics, ComponentLink1Description=Datasheet, ComponentLink1URL=N.A., ComponentLink2Description="Supplier link", ComponentLink2URL=N.A., Footprint Doc=0603, HelpURL="\\hizz\pro\app9717\Datasheet\optoelectronics\Victory Electronics\VS 25C7M5.pdf", LatestRevisionDate=2020-10-23, Manufacturer Part Number="VS 25C7M5", Note=N.A., Pad Count=2, Part Number="VS 25C7M5", PartId=101400097, Pin Count=2, Published=2017-08-21, Publisher="Nordic Semiconductor", Supplier 1="EC Partner", Supplier 2=N.A., Supplier Part Number 2=N.A.
LED5: library part "LG L29K Smartled Green", "LED, Green, 0603, 570nm, Vf=1.7V, 2.24..5.6mcd, - 40 to +100°C", Manufacturer=Osram, Manufacturer Part Number="LG L29K-G2J1-24-Z", Part number IPS=00000009961, Part number Norautron=N.A., Supplier Part Number 1=475-2709-1-ND, Artikkelnr Noca=13019147, Author=rsk, Component Class=Optoelectronics, ComponentLink1Description=Datasheet, ComponentLink1URL=N.A., ComponentLink2Description="Supplier link", ComponentLink2URL=N.A., Footprint Doc=0603, HelpURL=http://www.osram-os.com/Graphics/XPic2/00077107_0.pdf, LatestRevisionDate=2017-08-21, Note="2.24..5.6 mcd, Vfmin=1.7V", Pad Count=2, Part Number="LG L29K Smartled Green", PartId=101400096, Published=2014-10-28, Supplier 1=Digi-Key, Supplier 2=Mouser, Supplier Part Number 2=720-LGL29KG2J124Z
P1 P3 P6: library part "Socket 1x8 SMD", "Socket 1x8, 2.54mm (100mil), SMD", Manufacturer=W-CON, Manufacturer Part Number=2171-108MS0CUNR1, Part number IPS=00000009963, Artikkelnr Noca=55030002, Component Class=Connectors, ComponentLink1Description=Datasheet, ComponentLink1URL=N.A., ComponentLink2Description="Supplier link", ComponentLink2URL=N.A., Footprint Doc=SOCKET_1x8_SMD, HelpURL=N.A., LatestRevisionDate=2017-10-23, Note=N.A., Pad Count=8, Part Number="Socket 1x8 SMD", PartId=100500412, Pin Count=8, Published=2016-01-22, Publisher="Nordic Semiconductor", Supplier 1=Cabcon, Supplier 2=Samtec, Supplier Part Number 1=2171-108MS0CUNR1, Supplier Part Number 2=SSM-108-F-SV-P-TR
P2: library part "Socket 1x6 SMD", "Socket 1x6, 2.54mm (100mil), SMD", Manufacturer=W-CON, Manufacturer Part Number=2171-106MS0CUNR1, Part number IPS=00000009964, Artikkelnr Noca=55030001, Component Class=Connectors, ComponentLink1Description=Datasheet, ComponentLink1URL=N.A., ComponentLink2Description="Supplier link", ComponentLink2URL=N.A., Footprint Doc=SOCKET_1x6_SMD, HelpURL=N.A., LatestRevisionDate=2017-10-23, Note=N.A., Pad Count=6, Part Number="Socket 1x6 SMD", PartId=100500408, Pin Count=6, Published=2016-01-22, Publisher="Nordic Semiconductor", Supplier 1=Cabcon, Supplier 2=Samtec, Supplier Part Number 1=2171-106MS0CUNR1, Supplier Part Number 2=SSM-106-F-SV-P-TR
P4: library part "Socket 1x10 SMD", "Socket 1x10, 2.54mm (100mil), SMD", Manufacturer=W-CON, Manufacturer Part Number=2171-110MS0CUNR1, Part number IPS=00000009965, Artikkelnr Noca=55030004, Component Class=Connectors, ComponentLink1Description=Datasheet, ComponentLink1URL=N.A., ComponentLink2Description="Supplier link", ComponentLink2URL=N.A., Footprint Doc=SOCKET_1x10_SMD, HelpURL=N.A., LatestRevisionDate=2016-01-22, Note=N.A., Pad Count=10, Part Number="Socket 1x10 SMD", PartId=100500416, Pin Count=10, Published=2016-01-22, Publisher="Nordic Semiconductor", Supplier 1=Cabcon, Supplier 2=Samtec, Supplier Part Number 1=2171-110MS0CUNR1, Supplier Part Number 2=SSM-110-F-SV-P-TR
P5: library part "Pin Header 2x3 SMD", "Pin Header 2x3, 2.54mm (100mil) SMD", Manufacturer=W-CON, Manufacturer Part Number=1125-1203S0M116R1, Part number IPS=00000009966, Artikkelnr Noca=55010007, Component Class=Connectors, ComponentLink1Description=Datasheet, ComponentLink1URL=N.A., ComponentLink2Description="Supplier link", ComponentLink2URL=N.A., Footprint Doc=HDR_2x3-SMD, HelpURL=\\hizz\pro\app9717\Datasheet\connectors\W-CON\1125-12XXXXMXXXXX.PDF, LatestRevisionDate=2016-01-22, Note=SMD, Pad Count=6, Part Number="Pin Header 2x3 SMD", PartId=100500242, Pin Count=6, Published=2016-01-22, Publisher="Nordic Semiconductor", Supplier 1=Cabcon, Supplier 2=Samtec, Supplier Part Number 1=1125-1203S0M116R1, Supplier Part Number 2=TSM-103-01-L-DV
P7 P9 P12: library part "Pin List 1x8 SMD, N.C.", "Pin List 1x8, 2.54mm (100mil), SMD", Manufacturer=W-CON, Manufacturer Part Number=1125-1108S0M116R2, Part number IPS=N.A., Artikkelnr Noca=55010006, Assembly="Not mounted", Component Class=Connectors, ComponentLink1Description=Datasheet, ComponentLink1URL=N.A., ComponentLink2Description="Supplier link", ComponentLink2URL=N.A., Footprint Doc=LIST_1x8_SMD, HelpURL=\\hizz\pro\app9717\Datasheet\connectors\W-CON\1125-11XXXXMXXXXX.pdf, LatestRevisionDate=2016-01-22, Note=N.A., Pad Count=8, Part Number="Pin List 1x8 SMD, N.C.", PartId=100500330, Pin Count=8, Published=2016-01-22, Publisher="Nordic Semiconductor", Supplier 1=Cabcon, Supplier 2=Samtec, Supplier Part Number 1=1125-1108S0M116R2, Supplier Part Number 2=TSM-108-01-L-SV-P-TR
P8: library part "Pin List 1x6 SMD, N.C.", "Pin List 1x6, 2.54mm (100mil), SMD", Manufacturer=W-CON, Manufacturer Part Number=1125-1106S0M116R2, Part number IPS=N.A., Artikkelnr Noca=55010026, Assembly="Not mounted", Component Class=Connectors, ComponentLink1Description=Datasheet, ComponentLink1URL=N.A., ComponentLink2Description="Supplier link", ComponentLink2URL=N.A., Footprint Doc=LIST_1x6_SMD, HelpURL=\\hizz\pro\app9717\Datasheet\connectors\W-CON\1125-11XXXXMXXXXX.pdf, LatestRevisionDate=2016-03-29, Note=N.A., Pad Count=6, Part Number="Pin List 1x6 SMD, N.C.", PartId=100500321, Pin Count=6, Published=2016-03-29, Publisher="Nordic Semiconductor", Supplier 1=Cabcon, Supplier 2=Samtec, Supplier Part Number 1=1125-1106S0M116R2, Supplier Part Number 2=TSM-106-01-L-SV-P-TR
P10: library part "Pin List 1x10 SMD, N.C.", "Pin List 1x10, 2.54mm (100mil), SMD", Manufacturer=W-CON, Manufacturer Part Number=1125-1110S0M116R2, Part number IPS=N.A., Artikkelnr Noca=55010028, Assembly="Not mounted", Component Class=Connectors, ComponentLink1Description=Datasheet, ComponentLink1URL=N.A., ComponentLink2Description="Supplier link", ComponentLink2URL=N.A., Footprint Doc=LIST_1x10_SMD, HelpURL=\\hizz\pro\app9717\Datasheet\connectors\W-CON\1125-11XXXXMXXXXX.pdf, LatestRevisionDate=2016-03-29, Note=N.A., Pad Count=10, Part Number="Pin List 1x10 SMD, N.C.", PartId=100500338, Pin Count=10, Published=2016-03-29, Publisher="Nordic Semiconductor", Supplier 1=Cabcon, Supplier 2=Samtec, Supplier Part Number 1=1125-1110S0M116R2, Supplier Part Number 2=TSM-110-01-L-SV-P-TR
P11: library part "Socket 2x3 SMD Bottom, N.C.", "Socket 2x3, 2.54mm (100mil), SMD", Manufacturer=W-CON, Manufacturer Part Number=2171-203MS0CUNR1, Part number IPS=N.A., Artikkelnr Noca=55030010, Assembly="Not mounted", Component Class=Connectors, ComponentLink1Description=Datasheet, ComponentLink1URL=N.A., ComponentLink2Description="Supplier link", ComponentLink2URL=N.A., Footprint Doc=SOCKET_2x3_SMD-2.54mm-bottom, HelpURL=\\hizz\pro\app9717\Datasheet\connectors\W-CON\2171-2XXMXXCUNXX.pdf, LatestRevisionDate=2016-03-29, Note=N.A., Pad Count=6, Part Number="Socket 2x3 SMD Bottom, N.C.", PartId=100500434, Pin Count=6, Published=2014-06-10, Publisher="Nordic Semiconductor", Supplier 1=Cabcon, Supplier 2=Samtec, Supplier Part Number 1=2171-203MS0CUNR1, Supplier Part Number 2=SSM-103-F-DV-P-TR
P13 P15 P17: library part "Pin Header 2x8, N.C.", "Pin Header 2x8, 2.54mm (100mil)", Manufacturer=N.A., Artikkelnr Noca=N.A., Assembly="Not mounted", Component Class=Connectors, ComponentLink1Description=Datasheet, ComponentLink1URL=N.A., ComponentLink2Description="Supplier link", ComponentLink2URL=N.A., Footprint Doc=HDR_2x8, HelpURL=N.A., LatestRevisionDate=2009-12-12, Manufacturer Part Number=N.A., Note=N.A., Pad Count=16, Part Number="Pin Header 2x8, N.C.", Part number IPS=N.A., PartId=100500270, Pin Count=16, Published=2009-12-12, Publisher="Nordic Semiconductor", Supplier 1=N.A., Supplier 2=N.A., Supplier Part Number 1=N.A., Supplier Part Number 2=N.A.
P14: library part "Pin Header 2x6, N.C.", "Pin Header 2x6, 2.54mm (100mil)", Manufacturer=N.A., Artikkelnr Noca=N.A., Assembly="Not mounted", Component Class=Connectors, ComponentLink1Description=Datasheet, ComponentLink1URL=N.A., ComponentLink2Description="Supplier link", ComponentLink2URL=N.A., Footprint Doc=HDR_2x6, HelpURL=N.A., LatestRevisionDate=2014-07-04, Manufacturer Part Number=N.A., Note=N.A., Pad Count=12, Part Number="Pin Header 2x6, N.C.", Part number IPS=N.A., PartId=100500265, Pin Count=12, Published=2009-12-12, Publisher="Nordic Semiconductor", Supplier 1=N.A., Supplier 2=N.A., Supplier Part Number 1=N.A., Supplier Part Number 2=N.A.
P16: library part "Pin Header 2x10, N.C.", "Pin Header 2x10, 2.54mm (100mil)", Manufacturer=N.A., Artikkelnr Noca=N.A., Assembly="Not mounted", Component Class=Connectors, ComponentLink1Description=Datasheet, ComponentLink1URL=N.A., ComponentLink2Description="Supplier link", ComponentLink2URL=N.A., Footprint Doc=HDR_2x10, HelpURL=N.A., LatestRevisionDate=2017-02-02, Manufacturer Part Number=N.A., Note=N.A., Pad Count=20, Part Number="Pin Header 2x10, N.C.", Part number IPS=N.A., PartId=100500274, Pin Count=20, Published=2017-01-30, Publisher="Nordic Semiconductor", Supplier 1=N.A., Supplier 2=N.A., Supplier Part Number 1=N.A., Supplier Part Number 2=N.A.
P18 P19: library part "Pin Header 2x5 SMD, 1.27mm, KS", "Pin Header 2x5, 1.27mm (50mil), SMD, Keying Shroud", Manufacturer=W-CON, Manufacturer Part Number=3132-10MS0BK00R1, Part number IPS=00000009968, Artikkelnr Noca=55010009, Component Class=Connectors, ComponentLink1Description=Datasheet, ComponentLink1URL=N.A., ComponentLink2Description="Supplier link", ComponentLink2URL=N.A., Footprint Doc=HDR_2x5-SMD-1.27mm, HelpURL=\\hizz\pro\app9717\Datasheet\connectors\W-CON\3132-XXMXXBK00XX.pdf, LatestRevisionDate=2016-04-21, Note=N.A., Pad Count=10, Part Number="Pin Header 2x5 SMD, 1.27mm, KS", PartId=100500261, Pin Count=10, Published=2016-01-22, Publisher="Nordic Semiconductor", Supplier 1=Cabcon, Supplier 2=Samtec, Supplier Part Number 1=3132-10MS0BK00R1, Supplier Part Number 2=FTSH-105-01-F-DV-K
P20: library part "Pin List 1x13 SMD", "Pin List 1x13, 2.54mm (100mil), SMD", Manufacturer=N.A., Part number IPS=00000002499, Supplier Part Number 1=1125-1113S0M116R2, Artikkelnr Noca=N.A., Component Class=Connectors, ComponentLink1Description=Datasheet, ComponentLink1URL=N.A., ComponentLink2Description="Supplier link", ComponentLink2URL=N.A., Footprint Doc=LIST_1x13_SMD, HelpURL=N.A., LatestRevisionDate=2015-11-10, Manufacturer Part Number=N.A., Note=N.A., Pad Count=13, Part Number="Pin List 1x13 SMD", PartId=100500345, Pin Count=13, Published=2015-11-10, Publisher="Nordic Semiconductor", Supplier 1=Cabcon, Supplier 2=Samtec, Supplier Part Number 2=TSM-113-01-L-SV-P-TR
P21 P22 P23: library part "Pin List Ang 1x2 SMD, 2.54mm", "Pin List 1x2, 2.54mm (100mil), Right Angled, SMD", Manufacturer=W-CON, Manufacturer Part Number=1125B-1102S0Z135R2, Part number IPS=00000009972, Artikkelnr Noca=55010023, Component Class=Connectors, ComponentLink1Description=Datasheet, ComponentLink1URL=N.A., ComponentLink2Description="Supplier link", ComponentLink2URL=N.A., Footprint Doc=LIST_ANG_1x2-SMD-2.54MM, HelpURL=\\hizz\pro\app9717\Datasheet\connectors\W-CON\1125B-11XXXXZXXXXX.pdf, LatestRevisionDate=2016-05-26, Note=N.A., Pad Count=2, Part Number="Pin List Ang 1x2 SMD, 2.54mm", PartId=100500354, Pin Count=2, Published=2016-01-22, Publisher="Nordic Semiconductor", Supplier 1=Cabcon, Supplier 2=Samtec, Supplier Part Number 1=1125B-1102S0Z135R2, Supplier Part Number 2=TSM-102-01-L-SH-A
P24: library part "Socket 2x10 SMD", "Socket 2x10, 2.54mm (100mil), SMD", Manufacturer=W-CON, Manufacturer Part Number=2171-210MS0CUNR1, Part number IPS=N.A., Artikkelnr Noca=N.A., Author=rsk, Component Class=Connectors, ComponentLink1Description=Datasheet, ComponentLink1URL=N.A., ComponentLink2Description="Supplier link", ComponentLink2URL=N.A., Footprint Doc=SOCKET_2x10_SMD-2.54mm, HelpURL=N.A., LatestRevisionDate=2017-10-23, Note=N.A., Pad Count=20, Part Number="Socket 2x10 SMD", Part number Norautron=N.A., PartId=100500441, Published=2016-07-07, Supplier 1=Cabcon, Supplier 2=Samtec, Supplier Part Number 1=2171-210MS0CUNR1, Supplier Part Number 2=SSM-110-F-DV-P-TR
P25: library part "Pin Header 2x10 SMD, 1.27mm, KS, N.C.", "Pin Header 2x10, 1.27mm (50mil), SMD, Keying Shroud", Manufacturer=W-CON, Manufacturer Part Number=3132-20MS0BK00R1, Part number IPS=N.A., Artikkelnr Noca=N.A., Assembly="Not mounted", Component Class=Connectors, ComponentLink1Description=Datasheet, ComponentLink1URL=N.A., ComponentLink2Description="Supplier link", ComponentLink2URL=N.A., Footprint Doc=HDR_2x10-SMD-1.27mm, HelpURL=N.A., LatestRevisionDate=2017-10-23, Note=N.A., Pad Count=20, Part Number="Pin Header 2x10 SMD, 1.27mm, KS, N.C.", PartId=100500279, Pin Count=20, Published=2017-09-07, Publisher="Nordic Semiconductor", Supplier 1=Cabcon, Supplier 2=Digi-Key, Supplier Part Number 1=3132-20MS0BK00R1, Supplier Part Number 2=FTSH-110-01-F-DV-K-ND
P26: library part "Socket 1x13 SMD, N.C.", "Socket 1x13, 2.54mm (100mil), SMD", Manufacturer=W-CON, Manufacturer Part Number=2171-113MS0CUNR1, Part number IPS=N.A., Artikkelnr Noca=N.A., Assembly="Not mounted", Component Class=Connectors, ComponentLink1Description=Datasheet, ComponentLink1URL=N.A., ComponentLink2Description="Supplier link", ComponentLink2URL=N.A., Footprint Doc=SOCKET_1x13_SMD, HelpURL=N.A., LatestRevisionDate=2019-05-27, Note=N.A., Pad Count=13, Part Number="Socket 1x13 SMD, N.C.", PartId=100500422, Pin Count=13, Published=2019-05-27, Publisher="Nordic Semiconductor", Supplier 1=Cabcon, Supplier 2=Samtec, Supplier Part Number 1=2171-113MS0CUNR1, Supplier Part Number 2=SSM-113-L-SV-P-TR
P27: library part "Pin List 1x2, N.C.", "Pin List 1x2, 2.54mm (100mil)", Manufacturer=N.A., Artikkelnr Noca=N.A., Assembly="Not mounted", Component Class=Connectors, ComponentLink1Description=Datasheet, ComponentLink1URL=N.A., ComponentLink2Description="Supplier link", ComponentLink2URL=N.A., Footprint Doc=LIST_1x2, HelpURL=N.A., LatestRevisionDate=2017-02-02, Manufacturer Part Number=N.A., Note=N.A., Pad Count=2, Part Number="Pin List 1x2, N.C.", Part number IPS=N.A., PartId=100500298, Pin Count=2, Published=2017-01-30, Publisher="Nordic Semiconductor", Supplier 1=N.A., Supplier 2=N.A., Supplier Part Number 1=N.A., Supplier Part Number 2=N.A.
P28: library part "Pin List 1x3, N.C.", "Pin List 1x3, 2.54mm (100mil)", Manufacturer=N.A., Artikkelnr Noca=N.A., Assembly="Not mounted", Component Class=Connectors, ComponentLink1Description=Datasheet, ComponentLink1URL=N.A., ComponentLink2Description="Supplier link", ComponentLink2URL=N.A., Footprint Doc=LIST_1x3, HelpURL=N.A., LatestRevisionDate=2017-09-07, Manufacturer Part Number=N.A., Note=N.A., Pad Count=3, Part Number="Pin List 1x3, N.C.", Part number IPS=N.A., PartId=100500305, Pin Count=3, Published=2017-09-07, Publisher="Nordic Semiconductor", Supplier 1=N.A., Supplier 2=N.A., Supplier Part Number 1=N.A., Supplier Part Number 2=N.A.